# Altium PCB RM-KM-CS  V1.0.PcbDoc
Units mm, origin at the board's own origin, x right, y up, seen from the top; angles counter-clockwise.
Board outline 152.4 x 101.6 mm, 2 copper layers (Top Layer, Bottom Layer); 30 components, 25 nets, 114 pads, 27 vias.
Unrouted connection lines stored in the file: 1.
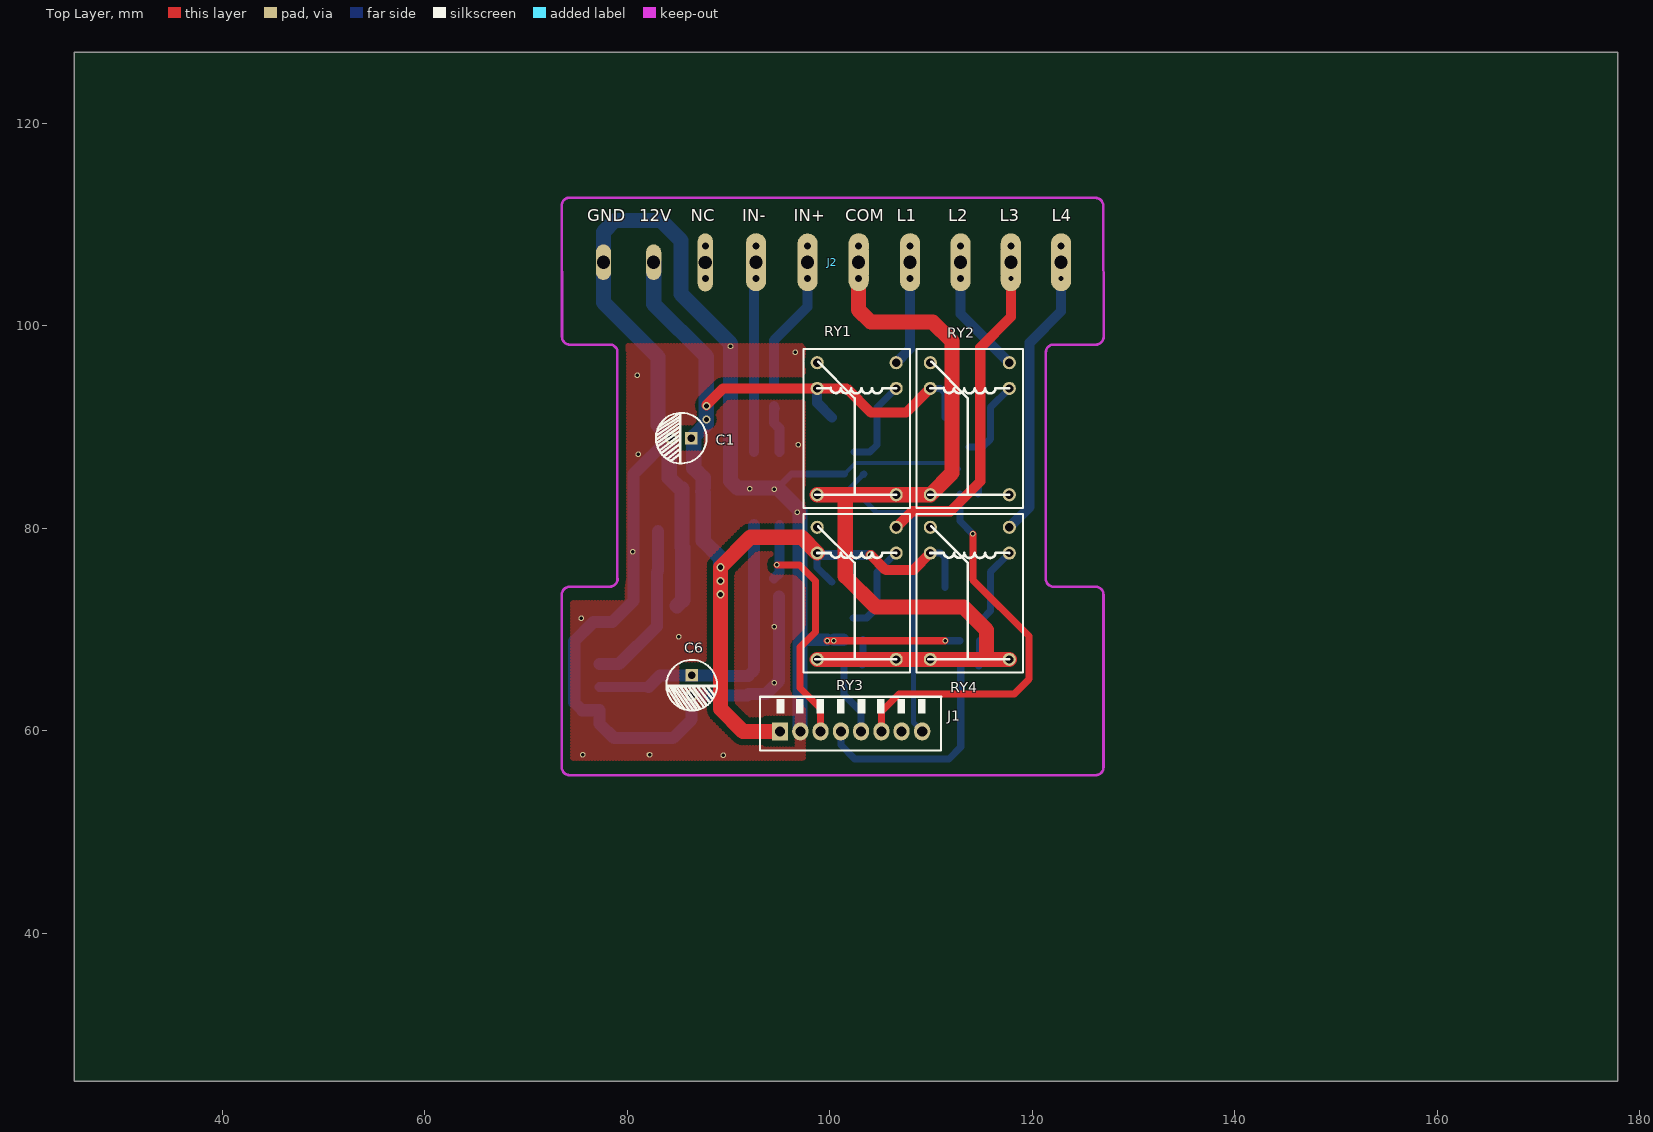
[diagram p0: Top Layer view]
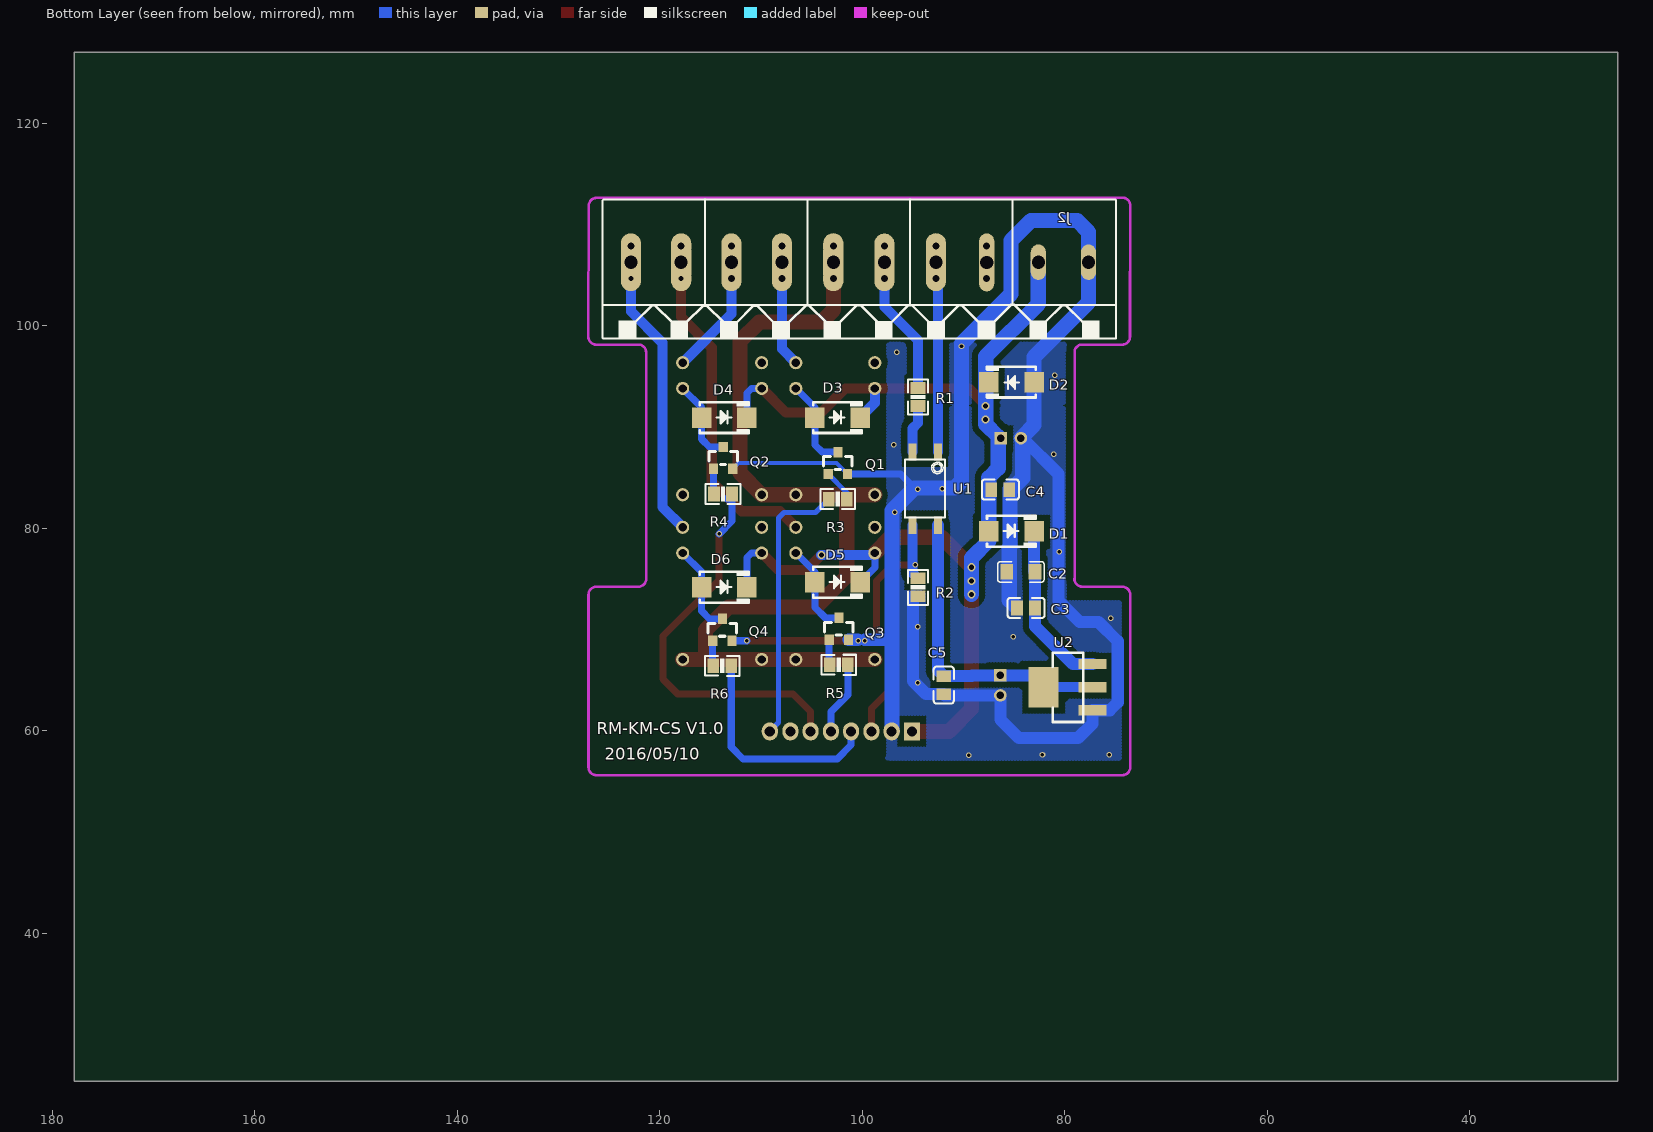
[diagram p1: Bottom Layer view, seen from below]
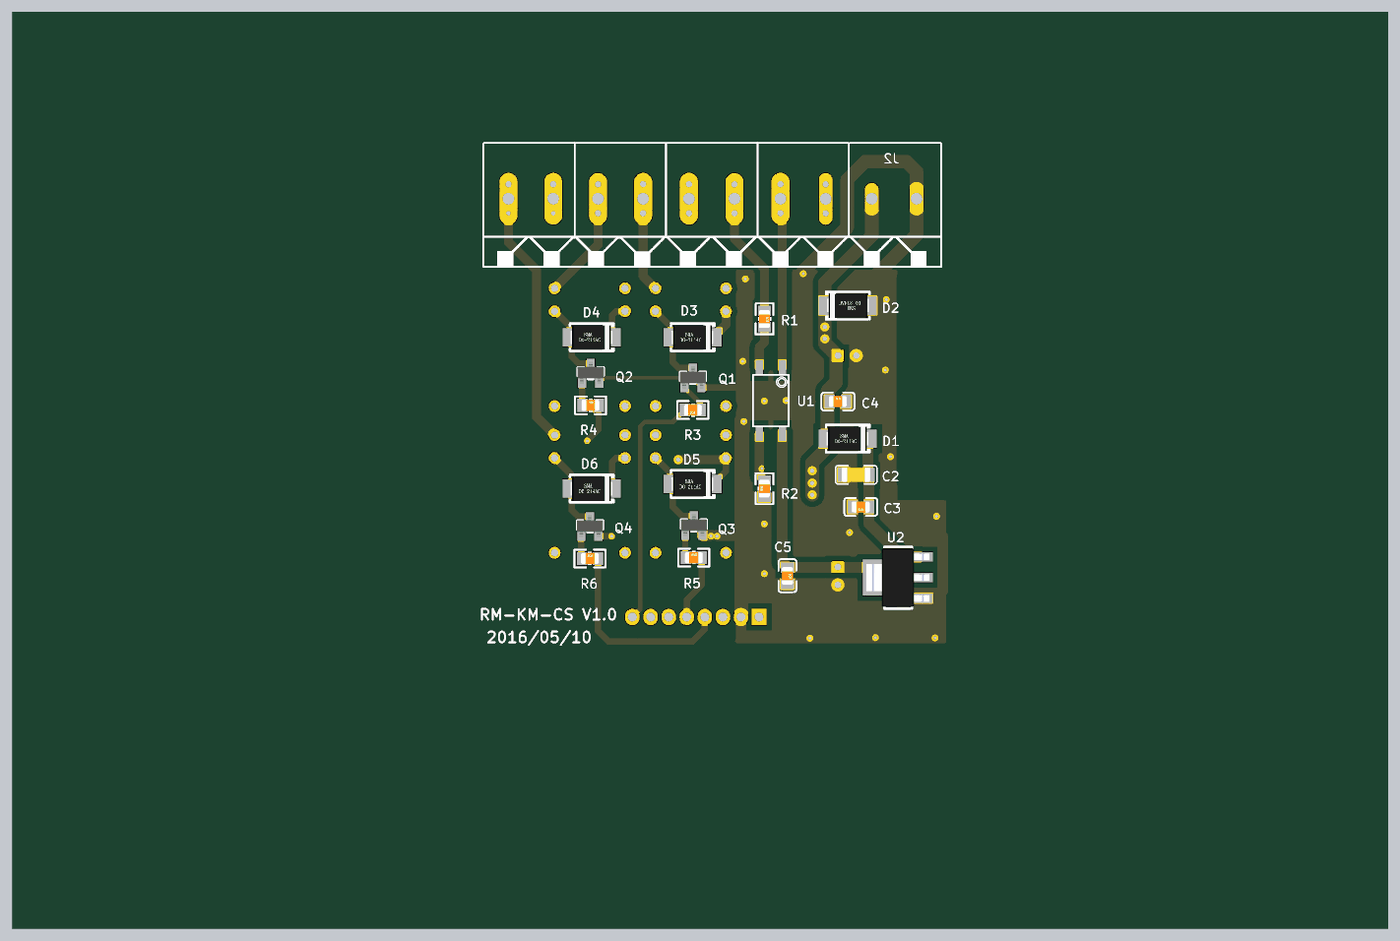
[diagram p2: 3D render of the assembled board from below, using the file's embedded part models]

## Layer stack, top to bottom
Top Layer: signal copper 0.0356
Dielectric: dielectric 0.32, FR-4, Dk 4.8
Bottom Layer: signal copper 0.0356

## Board outline
25.4,25.4 177.8,25.4 177.8,127 25.4,127

## Design rules (kind name [scope] priority, off if disabled: settings)
Clearance Clearance_1 [OnLayer('Keep-Out Layer')] p1: gap=0.7
Clearance [All] p2: gap=0.6
PlaneConnect [All] p1: planeconnectstyle=Direct reliefexpansion=0.508 reliefentries=4 reliefconductorwidth=0.254 reliefairgap=0.254
PolygonConnect [All] p1: connectstyle=Direct reliefconductorwidth=0.254 reliefentries=4 polygonreliefangle="90 Angle"
RoutingVias [All] p1: holewidth=0.711 width=1.27 viastyle="Through Hole" minholewidth=0.711 minwidth=1.27 maxholewidth=0.711 maxwidth=1.27
SilkscreenOverComponentPads [All] p1: minsilkscreentomaskgap=0.254
SolderMaskExpansion [All] p1: expansion=0.102
Width [All] p1: maxlimit=1.5 minlimit=0.3 preferedwidth=0.7
26 further rules are at their usual default settings.

## Components (designator, comment, footprint, x,y, rotation, side; value= is the part's Value field where it differs from the comment)
C1 "100uf/16v" CAP-DIP4*7 85.344,88.9 r180 top
C2 "10uF" 1206C 84.328,75.692 r0 bottom
C3 "104" 0805C 83.82,72.136 r0 bottom
C4 "104" 0805C 86.36,83.82 r180 bottom
C5 "104" 0805C 91.948,64.516 r270 bottom
C6 "100uf/16v" CAP-DIP4*7 86.36,64.516 r270 top
D1 "M7" M7 85.268,79.705 r180 bottom
D2 "M7" M7 85.268,94.437 r0 bottom
D3 "M7" M7 102.438,90.932 r180 bottom
D4 "M7" M7 113.614,90.932 r180 bottom
D5 "M7" M7 102.438,74.676 r180 bottom
D6 "M7" M7 113.614,74.168 r180 bottom
J1 "CON8" "DIP-8P-2.0 -1" 102.108,59.944 r0 top
J2 "CON10" SPI-10P-5.0_S 77.648,106.274 r0 top
Q1 "9013" SOT-23 102.413,86.436 r90 bottom
Q2 "9013" SOT-23 113.741,86.944 r90 bottom
Q3 "9013" SOT-23 102.311,70.079 r90 bottom
Q4 "9013" SOT-23 113.817,69.977 r90 bottom
R1 "1K" 0805R 94.488,92.964 r270 bottom
R2 "4.7K" 0805R 94.488,74.168 r90 bottom
R3 "1K" 0805R 102.413,82.88 r0 bottom
R4 "1K" 0805R 113.741,83.388 r180 bottom
R5 "1K" 0805R 102.311,66.523 r180 bottom
R6 "1K" 0805R 113.817,66.421 r180 bottom
RY1 "HK4100F-DC12V-SHG" RELAY 102.438,89.916 r180 top
RY2 "HK4100F-DC12V-SHG" RELAY 113.614,89.916 r180 top
RY3 "HK4100F-DC12V-SHG" RELAY 102.438,73.66 r180 top
RY4 "HK4100F-DC12V-SHG" RELAY 113.614,73.66 r180 top
U1 "EL357" EL357 93.98,83.972 r270 bottom
U2 "AMS1117-5" SOT-223 79.68,64.313 r0 bottom

## Footprints (in the part's own frame and the unit in brackets; to place one, negate y for a bottom-side part, rotate by r counter-clockwise, add the part's x,y. Pads: shape width x height; smd on the part's side, far side on the other; paste and mask are expansions set on the pad)
0805C [mm]
  rect 1.15x1.45 smd: 1(-0.889,0) 2(0.889,0)
  silkscreen extent -1.83,-0.99 1.83,0.99, body extent -1,-0.63 1,0.63, height 0.78
0805R [mm]
  rect 1.15x1.45 smd: 1(-0.889,0) 2(0.889,0)
  silkscreen extent -1.72,-0.99 1.71,0.99, body extent -1,-0.62 1,0.63, height 0.78
1206C [mil]
  rect 50x60 smd: 1(-55,0) 2(55,0)
  silkscreen extent -90,-40 90,40, body extent -62,-32 64,31, height 39
CAP-DIP4*7 [mm] "22UF 25V"
  rect 1.25x1.25 hole 0.75: 1(-0.984,0)
  round 1.25 hole 0.75: 2(1.016,0)
  silkscreen extent -2.48,-2.5 2.51,2.5
"DIP-8P-2.0 -1" [mm]
  rect 1.6x1.8 hole 1: 1(-7.016,0)
  oval 1.6x1.8 hole 1: 2(-5.016,0) 3(-3.016,0) 4(-1.016,0) 5(0.984,0) 6(2.984,0) 7(4.984,0) 8(7.016,0)
  silkscreen extent -9.01,-1.91 8.89,3.43
EL357 [mm] "SOP-4"
  rect 1.7x0.8 smd: 1(-3.548,1.468) 2(-3.548,-1.072) 3(3.672,-1.072) 4(3.672,1.468)
  silkscreen extent -2.8,-1.79 2.92,2.16
M7 [mil]
  rect 76x80 smd: A(-88,0) K(88,0)
  silkscreen extent -95,-60 95,60, body extent -92,-54 90,53, height 94
RELAY [mm]
  round 1.3 hole 0.813: 1(-4.115,6.604) 1(3.685,6.604) 2(3.685,-3.896) 3(3.685,-6.436) 4(-4.115,-6.436) 5(-4.115,-3.896)
  silkscreen extent -5.46,-7.77 5.05,7.9
SOT-23 [mil]
  rect 40x36 smd: 1(-42.5,37.5) 2(-42.5,-37.5) 3(42.5,-0.5)
  silkscreen extent -25,-56 25,55, body extent -47,-57 50,57, height 39
SOT-223 [mil]
  rect 110x40 smd: 1(-95,90) 2(-95,0) 3(-95,-90)
  rect 118.11x157.48 smd: 4(95,0)
  silkscreen extent -60,-134 60,135, body extent -136,-128 138,128, height 65
SPI-10P-5.0_S [mm]
  oval 1.5x3.5 hole 1.3: 1(0,0) 2(4.96,0)
  oval 1.5x2.5 hole 0.7: 3(10.06,-1.625) 3(10.06,1.595)
  rect 1.5x2.5 hole 1.3: 3(10.06,-0.02)
  oval 2x2.5 hole 0.7: 4(15.07,-1.605) 4(15.07,1.615) 5(20.159,-1.615) 5(20.159,1.585) 6(25.199,-1.615) 6(25.199,1.615) 7(30.28,-1.615) 7(30.28,1.615) 8(35.27,-1.615) 8(35.27,1.595) 9(40.23,1.605) 10(45.19,1.605)
  rect 2x2.5 hole 1.3: 4(15.07,0) 5(20.16,0) 6(25.2,0) 7(30.28,0) 8(35.27,0) 9(40.23,0) 10(45.19,0)
  oval 2x2.5 hole 0.5: 9(40.23,-1.605) 10(45.19,-1.605)

## Part data
C1 C6: library part ECAP
C2: library part ELECTRO1, "Electrolytic Capacitor"
C3 C4 C5: library part CAP
R1 R2 R3 R4 R5 R6: library part RES
RY1 RY2 RY3 RY4: library part RELAY5V
U1: library part 817
U2: library part VOL

## Via types
v1: diameter 0.55, hole 0.35, Top Layer to Bottom Layer, 21 vias
v2: diameter 0.8, hole 0.5, Top Layer to Bottom Layer, 6 vias

## Nets (pads, with @x,y where several pads share a name; then routed paths per layer and width w, separated by ;. In a path a pad name is that pad's centre, name@x,y a point inside that pad or via, vN(x,y) a via of type N, cw(c..) or ccw(c..) an arc to the next point about the centre after c; other vN are vias at no path point)
+5V: C5.1 C6.1 U1.4 U2.2 U2.4 | length 30.3
  Bottom Layer w1: U2.2 U2.4
  Bottom Layer w1.2: U2.4 83.236,65.456 89.129,65.456 89.157,65.427 C5.1@91.948,65.427 ; C5.1 C5.1@91.948,65.427 ; U1.4 92.512,65.991 C5.1@91.948,65.427
+12V: C1.1 C4.1 D1.A D2.K D3.K D4.K D5.K D6.K J1.1 J2.2 RY1.2 RY2.2 RY3.2 RY4.2 | length 121.9
  Top Layer w1: v2@87.808,92.151 89.469,93.812 RY1.2 101.666,93.812 104.064,91.415 107.532,91.415 RY2.2 ; v2(104.038,77.368) 105.537,75.87 108.243,75.87 RY4.2
  Top Layer w1.5: J1.1 91.44,59.944 89.205,62.179 v2(89.205,73.482) v2(89.205,74.778) v2(89.205,76.149) 92.177,79.121 97.188,79.121 RY3.2
  Bottom Layer w0.7: RY3.2 98.753,76.126 D5.K ; RY4.2 110.937,77.556 111.379,77.114 D6.K ; RY2.2 110.937,93.812 111.379,93.37 D4.K
  Bottom Layer w1: RY3.2 98.941,77.368 v2(104.038,77.368) ; RY1.2 98.753,92.382 D3.K
  Bottom Layer w1.5: J2.2 82.608,102.152 87.808,96.952 v2@87.808,92.135 ; C4.1@87.452,83.617 87.503,83.566 D1.A 87.503,78.765 89.205,77.064 v2(89.205,73.482) ; C4.1@87.507,84.078 87.507,84.993 86.563,85.937 86.563,89.035 87.808,90.28 ; v2@87.808,90.957 87.808,90.28 ; v2@87.808,92.015 87.808,90.28
  other v2: 87.808,90.754 87.808,92.075
COM: J2.6 RY1.1 RY2.1 RY3.1 RY4.1 | length 95.2
  Top Layer w0.7: RY3.1@106.553,67.056 RY4.1@109.929,67.056
  Top Layer w1.5: RY3.1@98.753,67.056 106.553,67.056 109.929,67.056 115.468,67.056 ; RY1.1@98.753,83.312 101.524,83.312 ; J2.6@102.848,106.274 J2.6@102.848,104.658 ; J2.6@102.847,107.888 J2.6@102.847,104.658 ; RY4.1@117.729,67.056 115.468,67.056 ; 101.524,83.312 101.524,75.26 104.572,72.212 107.29,72.212 108.128,72.212 113.208,72.212 115.468,69.952 115.468,67.056 ; 101.524,83.312 106.553,83.312 109.929,83.312 112.065,85.448 112.065,98.476 110.16,100.381 104.038,100.381 102.847,101.572 J2.6@102.847,104.658
  Bottom Layer w0.7: RY3.1@106.553,67.056 RY3.1@106.623,66.986
COM1: J2.5 R1.1 | length 15.4
  Bottom Layer w1: R1.1 94.488,98.552 97.808,101.872 97.808,102.387 97.808,106.274 J2.5@97.808,107.858
GND: C1.2 C2.2 C3.2 C4.2 C5.2 C6.2 D2.A J1.2 J2.1 Q1.2 Q2.2 Q3.2 Q4.2 R2.1 U2.1 | length 206.6
  Top Layer w0.7: v1(99.746,68.897) v1(100.406,68.897) v1(111.392,68.897)
  Bottom Layer w0.381: Q1.2 102.54,86.436 112.217,86.436 Q2.2
  Bottom Layer w0.7: 94.838,83.972 96.223,85.357 Q1.2 ; v1(111.392,68.897) Q4.2
  Bottom Layer w1.2: U2.1@77.267,61.849 77.267,60.706 78.689,59.284 84.531,59.284 86.36,61.112 C6.2 91.843,63.5 C5.2@91.948,63.605 ; U2.1 75.547,62.027 74.76,62.814 74.76,68.842 76.657,70.739 78.511,70.739 80.62,72.847 80.62,85.369 C1.2@84.15,88.9 ; C5.2 93.701,63.627 94.996,64.922 R2.1@94.996,73.279 ; 97.053,68.999 v1@99.746,68.999 ; v1@100.406,68.999 Q3.2
  Bottom Layer w1.5: C1.2 C1.2@84.15,88.9 ; C3.2@84.925,72.352 85.471,72.898 85.471,78.092 85.407,78.157 85.407,83.884 C4.2@85.385,83.906 ; C4.2@85.299,83.82 84.15,84.969 C1.2@84.15,88.9 ; J1.2@97.053,59.983 97.053,68.999 97.053,81.758 96.972,81.839 94.838,83.972 90.881,83.972 90.195,84.658 v1(90.195,97.968) 90.195,98.247 85.319,103.124 85.319,108.407 83.337,110.388 78.765,110.388 77.648,109.271 J2.1 77.648,102.286 83.033,96.901 D2.A 83.033,90.195 84.15,89.078 C1.2@84.15,88.9
  other v1: 89.459,57.6 75.6,57.633 82.2,57.658 94.5,64.745 85.065,69.3 94.5,70.256 75.438,71.1 80.543,77.7 96.774,81.6 94.5,83.871 92.1,83.922 81.102,87.3 96.9,88.265 81,95.098 96.6,97.384
IN: J2.4 U1.1 | length 20.6
  Bottom Layer w1: U1.1@92.532,87.52 92.532,106.197 92.202,107.373 J2.4@92.718,107.888
IN_SIG: J1.3 R2.2 U1.3 | length 26.3
  Top Layer w0.7: v1(94.767,76.378) 97.003,76.378 98.577,74.803 98.577,69.774 97.053,68.25 97.053,64.237 99.092,62.198 J1.3
  Bottom Layer w1: R2.2 95.052,75.621 U1.3
L1: J2.7 RY1.4 | length 13.7
  Bottom Layer w1: RY1.4 107.928,97.727 J2.7@107.928,104.658 ; J2.7@107.928,107.888 J2.7@107.928,106.274 ; J2.7@107.928,104.658 J2.7@107.928,106.274 ; J2.7@107.928,104.658 J2.7@107.928,106.274
L2: J2.8 RY2.4 | length 15.1
  Bottom Layer w1: J2.8@112.918,107.868 J2.8@112.918,106.274 ; RY2.4 112.918,101.163 J2.8@112.918,104.658 ; J2.8@112.918,104.658 J2.8@112.918,106.274 ; J2.8@112.918,104.658 J2.8@112.918,106.274
L3: J2.9 RY3.4 | length 34.7
  Top Layer w1: RY3.4 108.138,81.681 111.912,81.681 114.859,84.627 114.859,97.841 117.878,100.86 117.878,104.668 117.878,106.274 J2.9@117.878,107.878
L4: J2.10 RY4.4 | length 34.7
  Top Layer w1: J2.10@122.838,107.878 J2.10@122.838,106.274 ; J2.10@122.838,106.274 122.838,104.668 J2.10@122.838,106.274
  Bottom Layer w1: RY4.4 119.736,82.103 119.736,98.323 122.838,101.426 122.838,104.668 122.838,106.274 J2.10@122.838,107.878
NetC2_1: C2.1 C3.1 D1.K U2.3 | length 16.6
  Bottom Layer w1.2: U2.3 79.197,66.599 82.931,70.333 C3.1 C2.1 83.033,75.794 D1.K
NetD3_A: D3.A Q1.3 RY1.5 | length 8.9
  Bottom Layer w0.7: Q1.3 103.95,87.516 104.673,88.24 D3.A 104.673,91.932 RY1.5
NetD4_A: D4.A Q2.3 RY2.5 | length 8.2
  Bottom Layer w0.7: Q2.3 115.075,88.024 115.849,88.798 D4.A 115.849,91.932 RY2.5
NetD5_A: D5.A Q3.3 RY3.5 | length 8.9
  Bottom Layer w0.7: Q3.3 103.645,71.158 104.673,72.187 D5.A 104.673,75.676 RY3.5
NetD6_A: D6.A Q4.3 RY4.5 | length 8.9
  Bottom Layer w0.7: Q4.3 115.075,71.056 115.849,71.831 D6.A 115.849,75.676 RY4.5
NetQ1_1: Q1.1 R3.1 | length 3.3
  Bottom Layer w0.5: R3.1 101.524,83.515 Q1.1
  Bottom Layer w0.7: Q1.1@103.302,85.293 Q1.1
NetQ2_1: Q2.1 R4.1 | length 2.5
  Bottom Layer w0.7: R4.1 114.694,83.452 Q2.1
NetQ3_1: Q3.1 R5.1 | length 2.5
  Bottom Layer w0.7: R5.1 103.264,66.586 Q3.1
NetQ4_1: Q4.1 R6.1 | length 2.5
  Bottom Layer w0.7: R6.1 114.77,66.485 Q4.1
NetR1_2: R1.2 U1.2 | length 5.1
  Bottom Layer w0.7: R1.2 R1.2@94.742,91.821
  Bottom Layer w1: R1.2 94.488,90.399 95.052,89.835 U1.2
RL1: J1.8 R3.2 | length 27.2
  Bottom Layer w0.5: R3.2 104.623,81.559 107.721,81.559 108.255,81.026 108.255,60.813 J1.8
RL2: J1.6 R4.2 | length 39.6
  Top Layer w0.7: J1.6 105.092,61.912 106.832,63.652 118.212,63.652 119.659,65.1 119.659,69.367 114.122,74.905 v1(114.122,79.451)
  Bottom Layer w0.7: R4.2@113.324,82.916 R4.2 112.852,80.721 v1(114.122,79.451)
RL3: J1.5 R5.2 | length 7.3
  Bottom Layer w0.7: R5.2 101.422,63.551 103.092,61.881 J1.5
RL4: J1.4 R6.2 | length 22.2
  Bottom Layer w0.7: J1.4 101.092,58.61 102.467,57.235 111.769,57.235 112.928,58.395 R6.2
pads on no net: J1.7 J2.3 RY1.3 RY2.3 RY3.3 RY4.3

## Polygon pours and split planes (outlines as drawn)
GND on Bottom Layer "Bottom Layer-No Net" (hatched 90Degree grid 0.3 track 0.5, remove dead copper): 80.01,85.598 80.01,87.122 80.01,98.146 80.035,98.171 83.16,98.171 97.409,98.171 97.409,96.622 97.409,57.328 97.46,57.277 97.409,57.277 96.393,57.277 87.605,57.277 74.422,57.277 74.473,57.328 74.473,72.644 79.934,72.644 79.985,72.695 80.01,72.72 80.01,85.598
GND on Top Layer "Bottom Layer-No Net" (hatched 90Degree grid 0.3 track 0.5, remove dead copper): 79.908,95.352 79.908,98.044 90.424,98.044 97.307,98.044 97.409,98.044 97.409,57.277 97.434,57.252 93.929,57.252 74.625,57.252 74.6,57.277 74.6,72.644 79.985,72.644 79.985,73.787 79.985,95.275 79.908,95.352

## Keep-outs
Keep-Out Layer:
  lines w0.254: 73.53,111.887 73.559,98.902 ccw(c74.321,98.902) 74.321,98.14 ; 73.538,111.887 cw(c74.3,111.887) 74.3,112.649 126.238,112.626 cw(c126.238,111.864) 127,111.864 127.034,98.901 cw(c126.272,98.901) 126.272,98.139 ; 74.295,74.219 ccw(c74.295,73.457) 73.533,73.457 73.533,56.388 ccw(c74.295,56.388) 74.295,55.626 126.263,55.626 ccw(c126.263,56.388) 127.025,56.388 127.025,73.457 ccw(c126.263,73.457) 126.263,74.219 ; 74.302,74.226 78.283,74.226 ; 74.422,98.14 78.232,98.14 ; 78.27,98.14 cw(c78.27,97.378) 79.032,97.378 ; 78.283,74.244 ccw(c78.283,75.006) 79.045,75.006 ; 79.033,75.006 79.033,97.378 ; 121.333,74.955 121.333,97.409 ; 121.333,74.993 ccw(c122.095,74.993) 122.095,74.231 ; 121.339,97.377 cw(c122.101,97.377) 122.101,98.139 ; 122.063,98.139 126.238,98.139 ; 122.095,74.226 126.18,74.226

## Silkscreen, mask and mechanical layers (free items; w line width, h text height)
Top Overlay:
  text "GND" at 76.073,110.312 h1.2
  text "12V" at 81.164,110.312 h1.2
  text "NC" at 86.256,110.312 h1.2
  text "IN-" at 91.347,110.312 h1.2
  text "IN+" at 96.438,110.312 h1.2
  text "COM" at 101.529,110.312 h1.2
  text "L1" at 106.621,110.312 h1.2
  text "L2" at 111.712,110.312 h1.2
  text "L3" at 116.803,110.312 h1.2
  text "L4" at 121.895,110.312 h1.2
Bottom Overlay:
  text "RM-KM-CS V1.0" at 126.187,59.639 h1.2
  text "2016/05/10" at 125.4,57.125 h1.2

## Text inside footprints (layer, text, board x,y; h text height)
C2: Mechanical 15 "1" at 84.164,76.142 h0.75 r180
C3: Mechanical 15 "1" at 83.656,72.586 h0.75 r180
C4: Mechanical 15 "1" at 86.524,83.37 h0.75
C5: Mechanical 15 "1" at 92.398,64.68 h0.75 r90
R1: Mechanical 15 "1" at 94.938,93.128 h0.75 r90
R2: Mechanical 15 "1" at 94.038,74.004 h0.75 r270
R3: Mechanical 15 "1" at 102.249,83.33 h0.75 r180
R4: Mechanical 15 "1" at 113.905,82.938 h0.75
R5: Mechanical 15 "1" at 102.475,66.073 h0.75
R6: Mechanical 15 "1" at 113.982,65.971 h0.75